# EAGLE board attiny_sensor (EAGLE 9.6.2)

Size 39.04 x 58.41 mm. Coordinates in mm from the lower left corner, seen from the top.
Outline: 0,0 39.04,0 39.04,58.41 0,58.41 0,0
Copper layers (1*16): Top 0.035mm / dielectric 1.5mm / Bottom 0.035mm
Design rules "default": minimum track width 6mil, minimum drill 0.35mm, track to track 6mil, track to pad 6mil, pad to pad 6mil, via to via 6mil, smd to smd 6mil, copper to edge 40mil, drill to drill 6mil, minimum pad ring 10mil, minimum via ring 8mil, stop-mask expansion 4mil, vias tented up to drill 0mil, thermal gap 10mil

## Footprints (pad centres in the part's own frame; a part is rotated, then mirrored left to right if it is on the bottom)
1X06 = drill 1.016 pad 1.88: 1 0,0; 2 2.54,0; 3 5.08,0; 4 7.62,0; 5 10.16,0; 6 12.7,0
DIP762W46P254L927H533Q8B = drill 0.813 square: 1 -3.81,3.81 | drill 0.813: 2 -3.81,1.27; 3 -3.81,-1.27; 4 -3.81,-3.81; 5 3.81,-3.81; 6 3.81,-1.27; 7 3.81,1.27; 8 3.81,3.81
SOT229P700X180-4N = smd 0.93 x 1.31: 1 -2.29,-3.345; 2 0,-3.345; 3 2.29,-3.345 | smd 3.24 x 1.31: 4 0,3.345
APDS-9960 = smd 0.6 x 0.72: 1 0.7,1.455; 2 0.7,0.485; 3 0.7,-0.485; 4 0.7,-1.455; 5 -0.7,-1.455; 6 -0.7,-0.485; 7 -0.7,0.485; 8 -0.7,1.455

## Placement (x,y rotation side)
JP1  [1X06]  6.35,46.99 0 top
U1  ATTINY85-20PU  [DIP762W46P254L927H533Q8B]  11.43,20.32 180 bottom
U2  AMS1117-3.3  [SOT229P700X180-4N]  -7.62,5.08 90 top  (outside the outline)
U3  APDS-9960  [APDS-9960]  25.4,35.56 90 top

## Library data of the parts
JP1 = SparkFun-Connectors
U1 = ATTINY85-20PU; AVAILABILITY: Warning; DESCRIPTION: AVR AVR® ATtiny, Functional Safety (FuSa) Microcontroller IC 8-Bit 20MHz 8KB (4K x 16) FLASH 8-PDIP; MF: Microchip Technology; MP: ATTINY85-20PU; PACKAGE: DIP-8 Atmel; PRICE: None; PURCHASE-URL: https://pricing.snapeda.com/search/part/ATTINY85-20PU/?ref=eda
U2 = AMS1117-3.3; AVAILABILITY: Unavailable; DESCRIPTION: Sot223/Pkg 1-Amp 3.3-Volt Low Drop Out Voltage Regulatator; MF: Advanced Monolithic Systems; MP: AMS1117-3.3; PACKAGE: SOT-89 ams; PRICE: None
U3 = SparkFun-Sensors; PROD_ID: SEN-12005

## Nets
ADJ/GND: U2.1
N$2: U1.7 U3.7
N$3: U1.2 U3.1
N$4: U1.5 U3.2
N$6: U3.3 U3.4
N$7: U1.4 U3.6
VCC: U1.8

## Tracks (layer width: path | path; a pad name or v marks a point on that pad's centre or on a via)
N$2  (1 unrouted)
N$3  (1 unrouted)
N$4  (1 unrouted)
N$6  (1 unrouted)
N$7  (1 unrouted)